# EAGLE board E-Piano-SM (EAGLE 9.4.0)
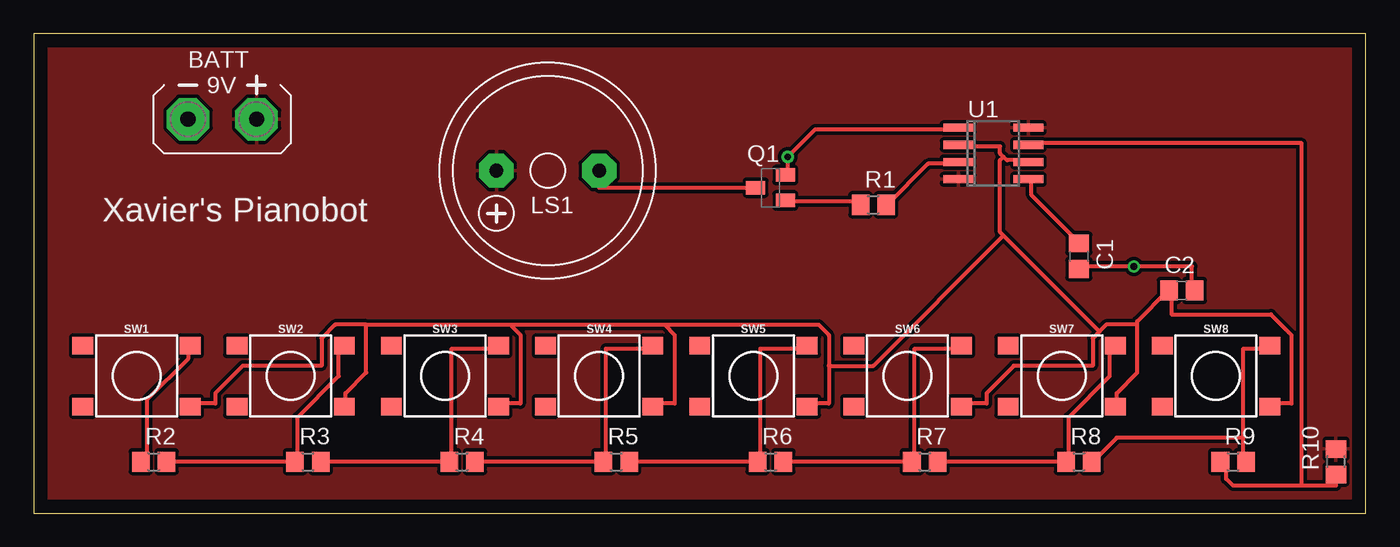
[diagram p0: board, top side]
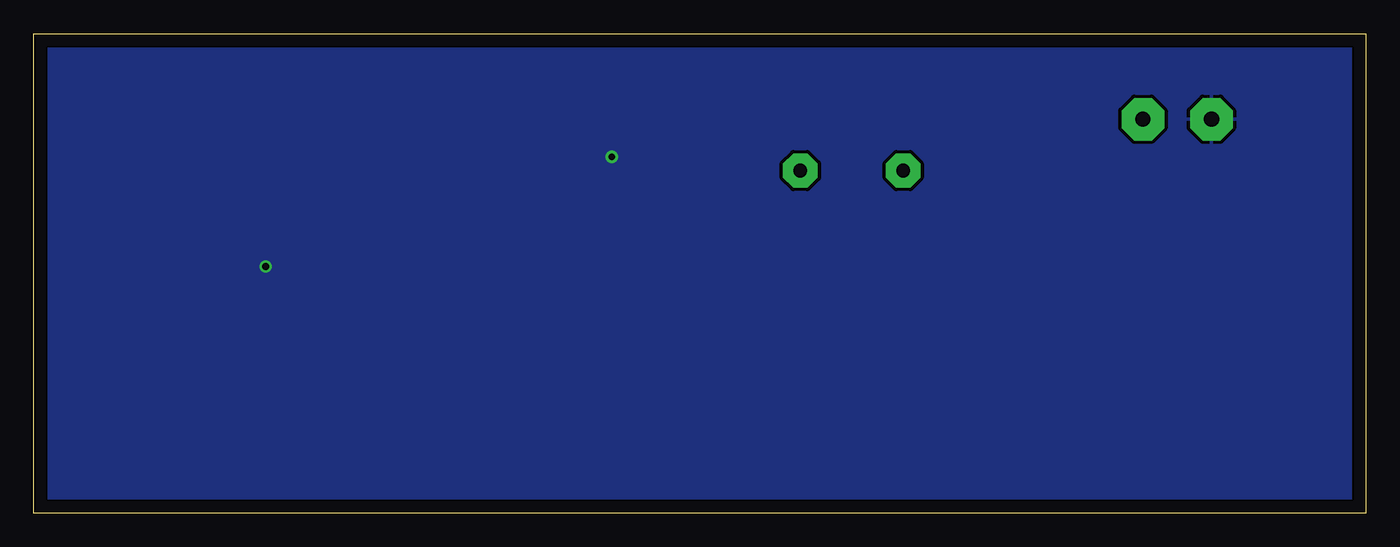
[diagram p1: board, bottom side, seen from below]

Size 98.73 x 35.55 mm. Coordinates in mm from the lower left corner, seen from the top.
Outline: 0,0 98.73,0 98.73,35.55 0,35.55 0,0
Copper layers (1*16): Top 0.035mm / dielectric 1.5mm / Bottom 0.035mm
Design rules "default": minimum track width 6mil, minimum drill 0.35mm, track to track 6mil, track to pad 6mil, pad to pad 6mil, via to via 6mil, smd to smd 6mil, copper to edge 40mil, drill to drill 6mil, minimum pad ring 10mil, minimum via ring 8mil, stop-mask expansion 4mil, vias tented up to drill 0mil, thermal gap 10mil
Net classes: 0 default: width 0.305 mm, drill 0.508 mm, clearance 0.254 mm

## Footprints (pad centres in the part's own frame; a part is rotated, then mirrored left to right if it is on the bottom)
AB9V = drill 1.118 pad 3.15 octagon: + 0,2.54; - 0,-2.54
C0805 = smd 1.3 x 1.5: 1 -0.95,0; 2 0.95,0
F/HMB = drill 1.016 pad 2.54 octagon: + 3.81,0; - -3.81,0
SOT23-BEC = smd 1 x 1.4: B -0.95,-1.1; C 0,1.1; E 0.95,-1.1
R0805 = smd 1.3 x 1.5: 1 -0.95,0; 2 0.95,0
TACTILE_SWITCH_SMD_6.2MM_TALL = smd 1.55 x 1.3: A1 -3.975,-2.25; A2 3.975,-2.25; B1 -3.975,2.25; B2 3.975,2.25
SO08 = smd 0.6 x 2.2: 1 -1.905,-2.6; 2 -0.635,-2.6; 3 0.635,-2.6; 4 1.905,-2.6; 5 1.905,2.6; 6 0.635,2.6; 7 -0.635,2.6; 8 -1.905,2.6

## Placement (x,y rotation side)
BATT  AB9V  [AB9V]  13.97,29.21 270 top
C1  0.1uF  [C0805]  77.47,19.05 270 top
C2  0.1uF  [C0805]  85.09,16.51 0 top
LS1  [F/HMB]  38.1,25.4 180 top
Q1  BCW66  [SOT23-BEC]  54.61,24.13 90 top
R1  1K  [R0805]  62.23,22.86 0 top
R2  1.5K  [R0805]  8.89,3.81 0 top
R3  1.3K  [R0805]  20.32,3.81 0 top
R4  620  [R0805]  31.75,3.81 0 top
R5  1.1K  [R0805]  43.18,3.81 0 top
R6  1K  [R0805]  54.61,3.81 0 top
R7  910  [R0805]  66.04,3.81 0 top
R8  390  [R0805]  77.47,3.81 0 top
R9  6.2K  [R0805]  88.9,3.81 0 top
R10  1K  [R0805]  96.52,3.81 90 top
SW1  MOMENTARY-SWITCH-SPST-SMD-6.2MM-TALL  [TACTILE_SWITCH_SMD_6.2MM_TALL]  7.62,10.16 0 top
SW2  MOMENTARY-SWITCH-SPST-SMD-6.2MM-TALL  [TACTILE_SWITCH_SMD_6.2MM_TALL]  19.05,10.16 0 top
SW3  MOMENTARY-SWITCH-SPST-SMD-6.2MM-TALL  [TACTILE_SWITCH_SMD_6.2MM_TALL]  30.48,10.16 0 top
SW4  MOMENTARY-SWITCH-SPST-SMD-6.2MM-TALL  [TACTILE_SWITCH_SMD_6.2MM_TALL]  41.91,10.16 0 top
SW5  MOMENTARY-SWITCH-SPST-SMD-6.2MM-TALL  [TACTILE_SWITCH_SMD_6.2MM_TALL]  53.34,10.16 0 top
SW6  MOMENTARY-SWITCH-SPST-SMD-6.2MM-TALL  [TACTILE_SWITCH_SMD_6.2MM_TALL]  64.77,10.16 0 top
SW7  MOMENTARY-SWITCH-SPST-SMD-6.2MM-TALL  [TACTILE_SWITCH_SMD_6.2MM_TALL]  76.2,10.16 0 top
SW8  MOMENTARY-SWITCH-SPST-SMD-6.2MM-TALL  [TACTILE_SWITCH_SMD_6.2MM_TALL]  87.63,10.16 0 top
U1  NE555D  [SO08]  71.12,26.67 270 top

## Library data of the parts
BATT = battery
C1 C2 = rcl; MOUSER#: 791-MT21B104K500CT; MPN: MT21B104K500CT; OC_NEWARK: unknown; SPICEPREFIX: C
LS1 = buzzer; MOUSER#: 665-AST-01508MR-R; OC_FARNELL: unknown; OC_NEWARK: unknown
Q1 = transistor; MF: INFINION TECHNOLOGIES; MOUSER#: 726-BCW66KHE6327HTSA; MPN: BCW66KHE6327HTSA1; OC_NEWARK: 58K2048
R1 R6 R10 = rcl; MOUSER#: 652-CR0805FX-1001ELF; MPN: CR0805FX-1001ELF; OC_NEWARK: unknown; SPICEPREFIX: R
R2 = rcl; MOUSER#: 652-CR0805FX-1501ELF; MPN: CR0805FX-1501ELF; OC_NEWARK: unknown; SPICEPREFIX: R
R3 = rcl; MOUSER#: 652-CR0805JW-132ELF; MPN: CR0805JW-132ELF; OC_NEWARK: unknown; SPICEPREFIX: R
R4 = rcl; MOUSER#: 652-CR0805JW-621ELF; MPN: CR0805JW-621ELF; OC_NEWARK: unknown; SPICEPREFIX: R
R5 = rcl; MOUSER#: 652-CR0805FX-1101ELF; MPN: CR0805FX-1101ELF; OC_NEWARK: unknown; SPICEPREFIX: R
R7 = rcl; MOUSER#: 652-CR0805FX-9100ELF; MPN: CR0805FX-9100ELF; OC_NEWARK: unknown; SPICEPREFIX: R
R8 = rcl; MOUSER#: 652-CR0805JW-391ELF; MPN: CR0805JW-391ELF; OC_NEWARK: unknown; SPICEPREFIX: R
R9 = rcl; MOUSER#: 652-CR0805FX-6201ELF; MPN: CR0805FX-6201ELF; OC_NEWARK: unknown; SPICEPREFIX: R
SW1-SW8 = SparkFun-Switches; MOUSER#: 653-B3F-1000; OC_NEWARK: unknown; PROD_ID: SWCH-11966; SF_SKU: COM-12992
U1 = linear; MOUSER#: 595-TLC555CDR; MPN: TLC555CDR; OC_NEWARK: 24M8296

## Nets
0: BATT.- C1.2 C2.2 Q1.E U1.1
N$1: R8.2 R9.2 SW8.B2
N$2: R9.1 R10.1 U1.7
N$3: R2.1 SW1.B2
N$4: R7.2 R8.1 SW7.B2
N$5: R6.2 R7.1 SW6.B2
N$6: R5.2 R6.1 SW5.B2
N$7: R4.2 R5.1 SW4.B2
N$8: R3.2 R4.1 SW3.B2
N$9: R2.2 R3.1 SW2.B2
N$11: R1.2 U1.3
N$12: C1.1 U1.5
N$13: LS1.- Q1.C
N$14: Q1.B R1.1
TR: C2.1 SW1.A2 SW2.A2 SW3.A2 SW4.A2 SW5.A2 SW6.A2 SW7.A2 SW8.A2 U1.2 U1.6
VCC: BATT.+ LS1.+ R10.2 U1.4 U1.8

## Tracks (layer width: path | path; a pad name or v marks a point on that pad's centre or on a via)
0  (via drill 0.51)
  Top 0.305: C1.2 77.47,18.29 v81.53,18.29 85.85,18.29 85.85,16.51 C2.2 | Q1.E 55.88,25.15 v55.88,26.42 57.91,28.45 68.33,28.45 U1.1
  pour Bottom: 0,35.56 99.06,35.56 99.06,0 0,0
N$1
  Top 0.305: 89.66,5.59 80.26,5.59 78.49,3.81 R8.2 | 89.66,5.59 89.66,3.81 R9.2 | 89.66,5.59 89.66,12.19 91.44,12.19 SW8.B2
N$2
  Top 0.305: 93.98,2.03 96.52,2.03 R10.1 | 93.98,2.03 88.9,2.03 88.39,2.54 88.39,3.56 88.14,3.81 R9.1 | 93.98,2.03 93.98,27.43 73.91,27.43 U1.7
N$3
  Top 0.305: R2.1 8.13,3.81 8.38,4.06 8.38,8.38 11.43,11.43 11.43,12.19 SW1.B2
N$4
  Top 0.305: R7.2 R8.1 76.71,3.81 76.71,7.11 79.76,10.16 79.76,11.94 80.01,12.19 SW7.B2
N$5
  Top 0.305: R6.2 R7.1 65.28,3.81 65.28,12.19 68.58,12.19 SW6.B2
N$6
  Top 0.305: R5.2 R6.1 53.85,3.81 53.85,12.19 57.15,12.19 SW5.B2
N$7
  Top 0.305: R4.2 R5.1 42.42,3.81 42.42,12.19 45.72,12.19 SW4.B2
N$8
  Top 0.305: R3.2 R4.1 30.99,3.81 30.99,12.19 34.29,12.19 SW3.B2
N$9
  Top 0.305: R2.2 R3.1 19.56,3.81 19.56,7.11 22.61,10.16 22.61,11.94 22.86,12.19 SW2.B2
N$11
  Top 0.305: R1.2 63.25,22.86 66.29,25.91 68.33,25.91 U1.3
N$12
  Top 0.305: C1.1 77.47,20.07 73.91,23.62 73.91,24.64 U1.5
N$13
  Top 0.305: Q1.C 41.91,24.13 LS1.-
N$14
  Top 0.305: Q1.B 55.88,23.11 61.21,23.11 61.21,22.86 R1.1
TR
  Top 0.305: 71.88,26.42 72.14,26.16 73.66,26.16 U1.6 | 71.88,26.42 71.63,26.67 71.63,27.18 68.58,27.18 U1.2 | 81.79,13.97 81.79,10.41 80.26,8.89 80.26,8.13 SW7.A2 | 81.79,13.97 81.79,14.22 84.07,16.51 C2.1 84.33,16.51 84.33,14.73 91.69,14.73 93.22,13.21 93.22,8.13 91.69,8.13 SW8.A2 | 78.99,13.46 79.5,13.97 81.79,13.97 | 78.99,13.46 78.49,12.95 78.49,10.92 72.64,10.92 70.61,8.89 70.61,8.13 68.83,8.13 SW6.A2 | 71.88,26.42 71.63,26.16 71.63,20.83 71.88,20.57 | 78.99,13.46 71.88,20.57 | 24.64,13.97 22.35,13.97 21.34,12.95 21.34,10.92 15.49,10.92 13.46,8.89 13.46,8.13 11.68,8.13 SW1.A2 | 24.64,13.97 24.64,10.41 23.11,8.89 23.11,8.13 SW2.A2 | 35.31,13.97 36.07,13.21 36.07,8.13 34.54,8.13 SW3.A2 | 24.64,13.97 35.31,13.97 | 46.74,13.97 47.5,13.21 47.5,8.13 45.97,8.13 SW4.A2 | 35.31,13.97 46.74,13.97 | 58.93,10.92 58.93,13.21 58.17,13.97 46.74,13.97 | 58.93,10.92 58.93,8.13 57.4,8.13 SW5.A2 | 71.88,20.57 62.23,10.92 58.93,10.92
VCC
  pour Top: 0,35.56 0,0 99.06,0 99.06,35.56

## Text on the board
tPlace: Xavier's Pianobot